# Altium PCB Triple_phase.PcbDoc
Units mil, origin at the board's own origin, x right, y up, seen from the top; angles counter-clockwise.
Board outline 3490 x 2415 mil, 2 copper layers (Top Layer, Bottom Layer); 14 components, 11 nets, 34 pads, 0 vias.
Unrouted connection lines stored in the file: 9.
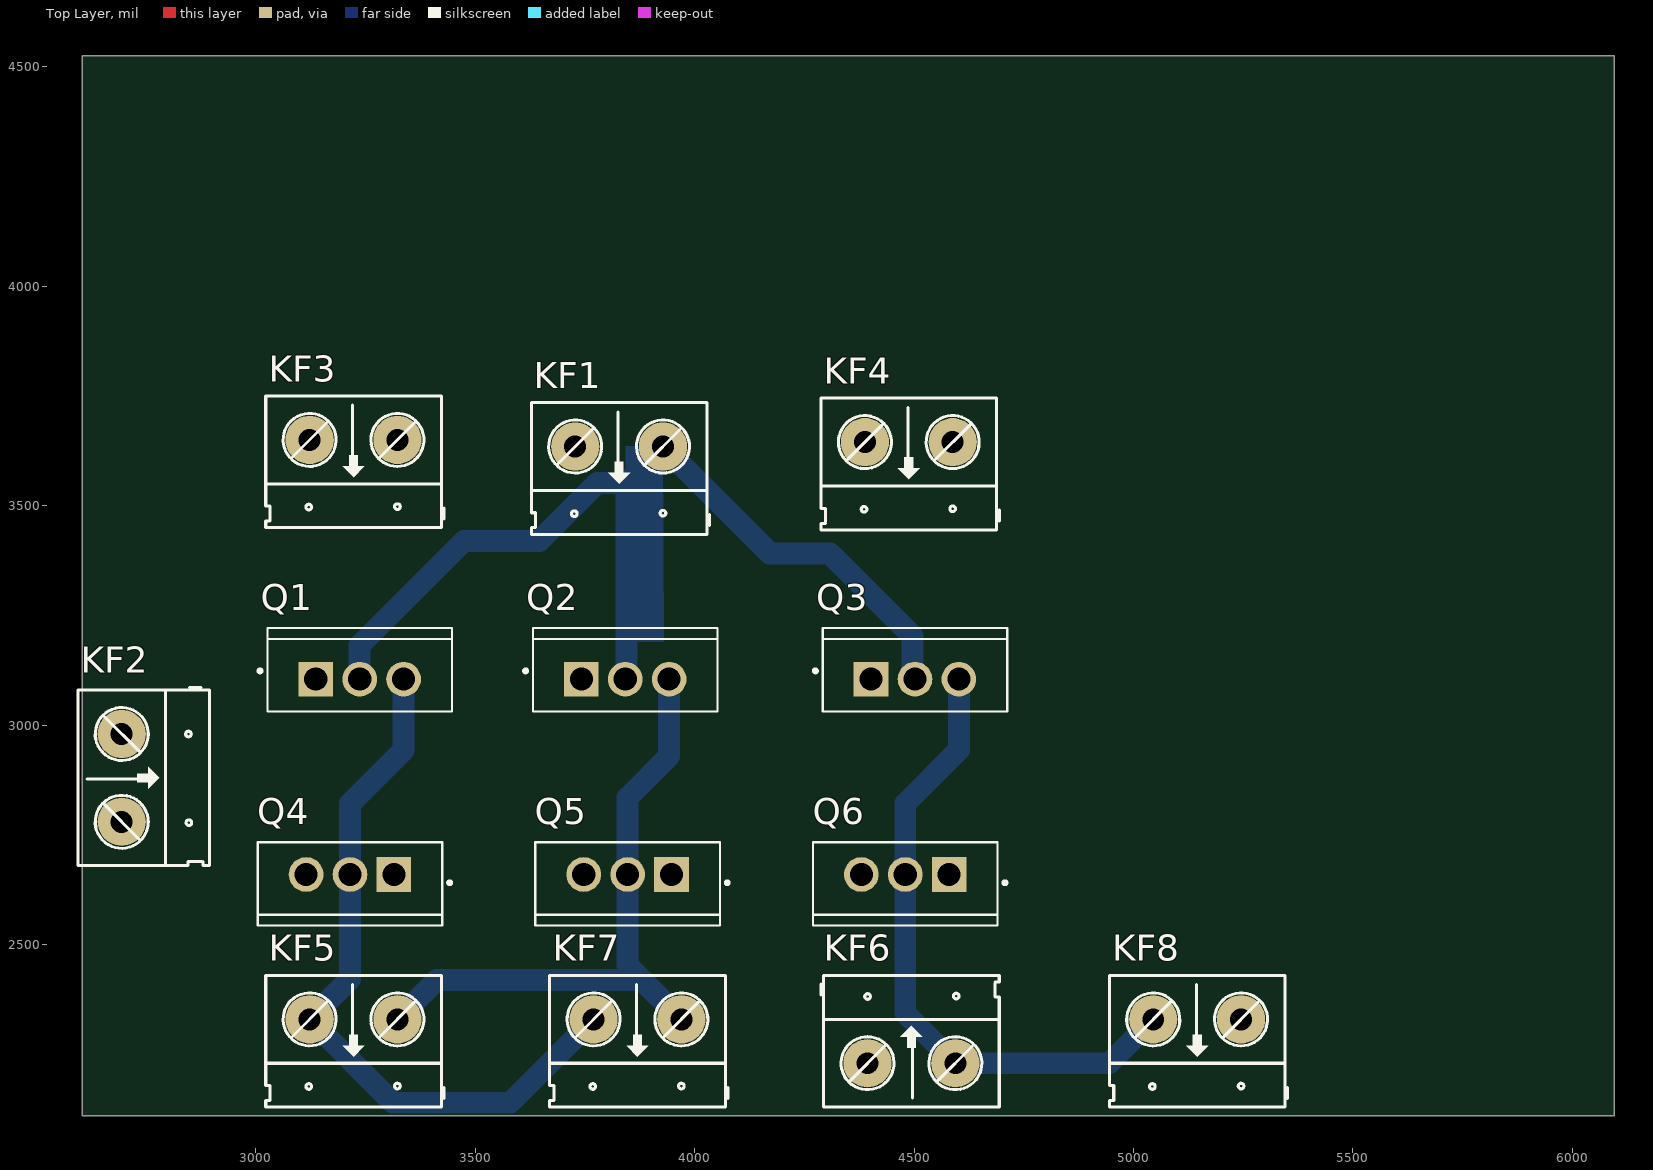
[diagram p0: Top Layer view]
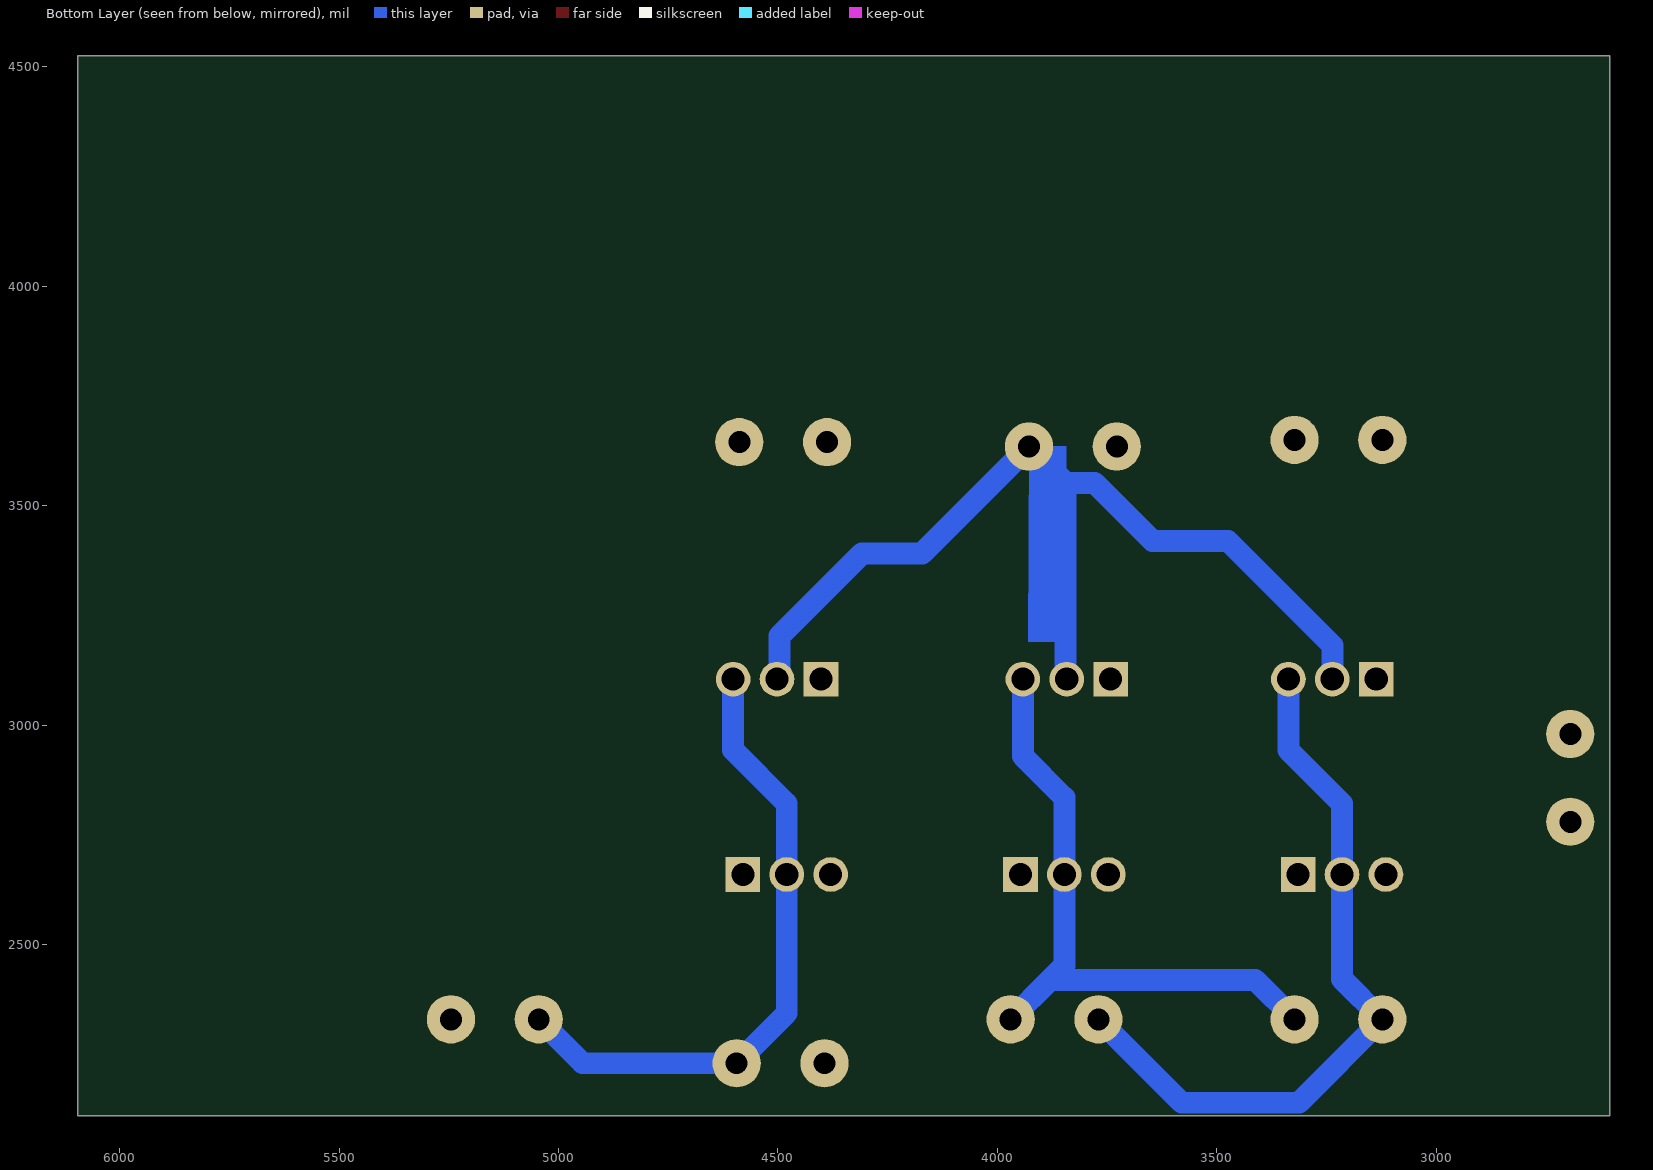
[diagram p1: Bottom Layer view, seen from below]

## Layer stack, top to bottom
Top Solder: solder mask 0.4, Solder Resist, Dk 3.5
Top Layer: signal copper 1.4
Dielectric 1: dielectric 12.6, FR-4, Dk 4.8
Bottom Layer: signal copper 1.4
Bottom Solder: solder mask 0.4, Solder Resist, Dk 3.5

## Board outline
2605,2110 6095,2110 6095,4525 2605,4525

## Design rules (kind name [scope] priority, off if disabled: settings)
Clearance [All] p1: gap=10 ignorepadtopadclearanceinfootprint=FALSE except(0: Arc-Hole Track-Hole SMDPad-Hole THPad-Hole Via-Hole Fill-Hole Poly-Hole Region-Hole Text-Hole)
PolygonConnect [All] p1: connectstyle=Relief reliefconductorwidth=10 reliefentries=4 polygonreliefangle="90 Angle" airgapwidth=10
RoutingVias [All] p1: holewidth=28 width=50 viastyle="Through Hole" minholewidth=28 minwidth=50 maxholewidth=28 maxwidth=50
SolderMaskExpansion [All] p1: expansion=4 istentingtop=FALSE
Width [All] p1: maxlimit=150 minlimit=10 preferedwidth=50 toplayer_maxwidth=10 toplayer_prefwidth=10 bottomlayer_minwidth=30 minimp=50.000000 maximp=50.000000 favimp=50.000000
30 further rules are at their usual default settings.

## Components (designator, comment, footprint, x,y, rotation, side; value= is the part's Value field where it differs from the comment)
KF1 "CON 2 KF301" "Con 2 KF301 5.08" 3928.07,3635 r180 top
KF2 "CON 2 KF301" "Con 2 KF301 5.08" 2695,2980 r270 top
KF3 "CON 2 KF301" "Con 2 KF301 5.08" 3323.07,3650 r180 top
KF4 "CON 2 KF301" "Con 2 KF301 5.08" 4588.07,3645 r180 top
KF5 "CON 2 KF301" "Con 2 KF301 5.08" 3323.07,2330 r180 top
KF6 "CON 2 KF301" "Con 2 KF301 5.08" 4394.07,2230 r0 top
KF7 "CON 2 KF301" "Con 2 KF301 5.08" 3970,2330 r180 top
KF8 "CON 2 KF301" "Con 2 KF301 5.08" 5245,2330 r180 top
Q1 "IRF3205PBF" TO254P1067X483X3124-3P 3137.14,3105 r0 top
Q2 "IRF3205PBF" TO254P1067X483X3124-3P 3742.14,3105 r0 top
Q3 "IRF3205PBF" TO254P1067X483X3124-3P 4402.14,3105 r0 top
Q4 "IRF3205PBF" TO254P1067X483X3124-3P 3315,2660 r180 top
Q5 "IRF3205PBF" TO254P1067X483X3124-3P 3947.5,2660 r180 top
Q6 "IRF3205PBF" TO254P1067X483X3124-3P 4580,2660 r180 top

## Footprints (in the part's own frame and the unit in brackets; to place one, negate y for a bottom-side part, rotate by r counter-clockwise, add the part's x,y. Pads: shape width x height; smd on the part's side, far side on the other; paste and mask are expansions set on the pad)
"Con 2 KF301 5.08" [mil]
  round 110 hole 50: 1(0,0) 2(200,0)
  silkscreen extent -106,-100 300,200, body extent -45,-97 255,190, height 335
TO254P1067X483X3124-3P [mm]
  rect 2.01x2.01 hole 1.34: 1(0,0)
  round 2.01 hole 1.34: 2(2.54,0) 3(5.08,0)
  silkscreen extent -3.33,-1.87 7.88,2.96

## Part data
KF1 KF2 KF3 KF4 KF5 KF6 KF7 KF8: "Cắm", Chung_Loai=Cắm, Don_Vi=Con, Ma_Hang=MH000987, Ten_Linh_Kien="CON 2 KF301-2P 5.08MM Xanh Dương"
Q1 Q2 Q3 Q4 Q5 Q6: "N-Channel 55V 110A _Tc_ 200W _Tc_ Through Hole TO-220AB", Package="TO-220 International Rectifier", Availability=Unavailable, MF="Infineon Technologies", MP=IRF3205PBF, Price=None, SnapEDA_Link=https://www.snapeda.com/parts/IRF3205PBF/Infineon%20Technologies/view-part/98571/?ref=snap

## Nets (pads, with @x,y where several pads share a name; then routed paths per layer and width w, separated by ;. In a path a pad name is that pad's centre, name@x,y a point inside that pad or via, vN(x,y) a via of type N, cw(c..) or ccw(c..) an arc to the next point about the centre after c; other vN are vias at no path point)
+16.8: KF1.1 Q1.2 Q2.2 Q3.2 | length 2251.8
  Bottom Layer w50: Q1.2 3237.14,3182.14 3475,3420 3646.68,3420 3778.62,3551.93 3845,3551.93 ; Q2.2 3845,3107.86 3845,3551.93 ; Q3.2 4496.56,3110.57 4496.56,3203.44 4308.71,3391.29 4171.78,3391.29 KF1.1 3845,3551.93
AH_FET: KF2.1 Q1.1
AL_FET: KF2.2 Q4.1
BH_FET: KF3.1 Q2.1
BL_FET: KF3.2 Q5.1
CH_FET: KF4.1 Q3.1
CL_FET: KF4.2 Q6.1
GND: KF1.2 Q4.3 Q5.3 Q6.3
PhaseA: KF5.2 KF7.2 Q1.3 Q4.2 | length 1668
  Bottom Layer w50: Q1.3 3337.14,2943.57 3215,2821.43 Q4.2 3215,2421.93 KF5.2 3313.07,2140 3580,2140 KF7.2
PhaseB: KF5.1 KF7.1 Q2.3 Q5.2 | length 1455.3
  Bottom Layer w50: KF5.1 3413.07,2420 3876.15,2420 ; Q2.3 3942.14,2929.82 3847.5,2835.18 Q5.2 3847.5,2452.5 3878.08,2421.92 KF7.1
PhaseC: KF6.2 KF8.2 Q3.3 Q6.2 | length 1465.2
  Bottom Layer w50: Q3.3 4602.14,2943.57 4480,2821.43 Q6.2 4480,2344.07 KF6.2 4945,2230 KF8.2
pads on no net: KF6.1 KF8.1

## Other copper
Bottom Layer:
  region net +16.8: 3928.07,3635 3843.57,3635 3843.57,3190 3930,3190